# Altium PCB LM_HTR_001.PcbDoc (part 2 of 2)
Units mm, origin at the board's own origin, x right, y up, seen from the top; angles counter-clockwise.
Board outline 67 x 180 mm, 4 copper layers (Top Layer, +5V, Signal Layer 1, Bottom Layer), stack 0.778 mm thick; 148 components, 116 nets, 443 pads, 81 vias.
Unrouted connection lines stored in the file: 123.
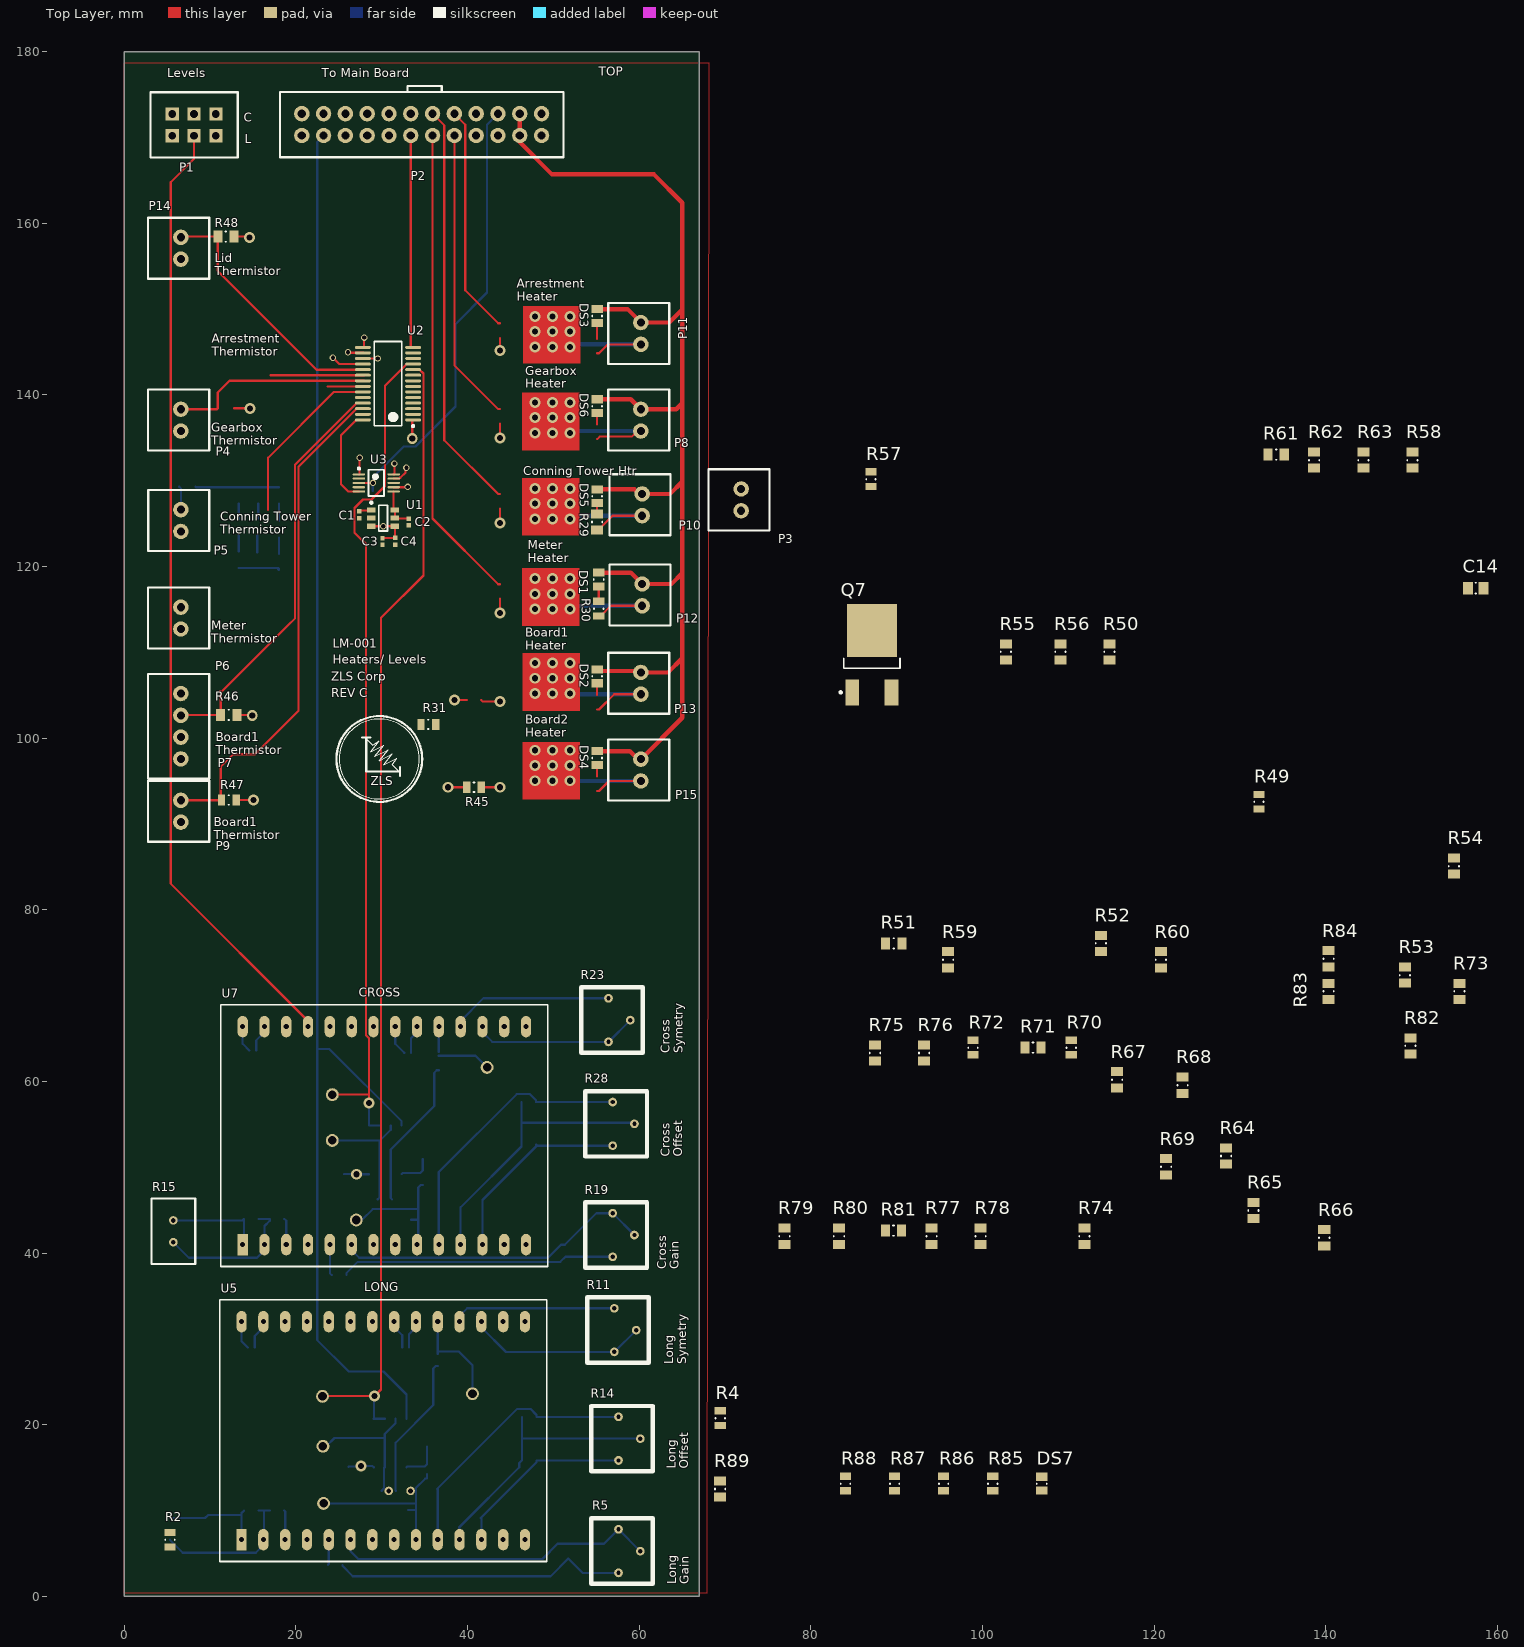
[diagram p0: Top Layer view]

## Via types
v1: diameter 1.27, hole 0.711, Top Layer to Bottom Layer, 71 vias
v2: diameter 0.75, hole 0.5, Top Layer to Bottom Layer, 10 vias

## Nets (pads, with @x,y where several pads share a name; then routed paths per layer and width w, separated by ;. In a path a pad name is that pad's centre, name@x,y a point inside that pad or via, vN(x,y) a via of type N, cw(c..) or ccw(c..) an arc to the next point about the centre after c; other vN are vias at no path point) (continued)
Cross_Yellow: (continued)
  Signal Layer 1 w0.254: P1.1 5.412,169.998 5.412,83.856 16.338,72.929 U7.27
  Bottom Layer w0.254: 15.386,63.583 15.386,64.782 16.338,65.734 U7.27
"CT Thermistor": C14.1 P5.2 R34.2 U8.2 | length 1.9
  Top Layer w0.254: 12.798,138.434 14.624,138.434 v1(14.643,138.415)
"Gearbox Heater FET": R47.1 | length 36.1
  Top Layer w0.254: R47.1@13.142,92.793 15.071,92.793 v1(15.075,92.796) ; 38.378,170.084 38.468,169.994 38.468,143.439 43.573,138.334 43.798,138.334
"Gearbox Htr Out": P6.2 Q3.4 R45.2 | length 15.2
  Top Layer w0.254: 55.098,134.834 55.396,135.132 59.131,135.132 59.78,135.781 60.198,135.781
  Bottom Layer w0.5: v1@50.456,135.781 60.198,135.781
  other v1: 47.866,135.561 49.898,135.561 51.93,135.561 47.866,137.339 49.898,137.339 51.93,137.339 47.866,139.117 49.898,139.117 51.93,139.117
"Gearbox Thermistor": P8.2 R53.2 | length 23.6
  Top Layer w0.254: 6.598,138.321 10.785,138.321 ; 10.898,138.434 10.898,140.267 12.263,141.632 27.909,141.632
"Lid Thermistor": P15.1 R89.2 | length 30.2
  Top Layer w0.254: 6.598,158.354 6.678,158.434 10.898,158.434 10.898,154.428 22.395,142.932 27.909,142.932
  Bottom Layer w0.254: 6.598,158.354 6.678,158.434
Long_Black: P1.4 U5.25 | length 147
  Signal Layer 1 w0.254: P1.4 7.088,171.674 7.088,166.609 7.139,166.558 7.139,160.411 7.8,159.751 7.8,140.32 7.988,140.131 7.988,95.122 17.35,85.761 17.35,36.603 21.293,32.659 U5.25
Long_Blue: P1.6 U5.24 | length 147.3
  Signal Layer 1 w0.254: P1.6 9.512,171.558 9.512,159.435 9.258,159.181 9.258,128.052 20.18,117.13 20.18,36.312 23.833,32.659 U5.24
Long_Raw: R8.1 TP1.1 U5.19 | length 11.8
  Bottom Layer w0.254: 36.533,28.234 U5.19 ; 36.538,28.546 38.939,28.546 40.577,26.909 TP1.1
Long_Yellow: C6.2 P1.2 U5.27 | length 149.4
  Signal Layer 1 w0.254: P1.2 4.548,171.674 4.548,81.57 10.29,75.828 10.29,38.582 16.213,32.659 U5.27
  Bottom Layer w0.254: 15.198,28.984 15.198,30.344 16.213,31.359 U5.27
"Meter Heater FET": R38.1 | length 55.6
  Top Layer w0.254: 35.838,170.084 35.928,169.994 35.928,125.579 43.573,117.934 43.798,117.934
"Meter Thermistor 1": P7.2 P7.3 | length 0.8
  Top Layer w0.254: 27.059,139.682 27.909,139.682
"Meter Thermistor 2": C1.2 C2.1 C3.2 C4.2 C5.2 C7.2 C9.2 C12.2 C13.2 P2.1 P2.2 P2.23 P2.24 P7.4 P15.2 Q1.3 Q2.3 Q3.3 Q4.3 Q5.3 Q6.3 Q7.3 R13.1 R27.1 R34.1 R42.1 R43.1 R44.1 R53.1 R64.1 R65.1 R66.1 R67.1 R68.1 R69.1 R73.1 R82.1 R83.1 R84.1 U1.2 U2.12 U2.27 U3.2 U3.4 U3.8 U5.22 U7.22 U8.11 | length 4.9
  Bottom Layer w0.254: R43.1 17.907,119.827 R44.1 ; R44.1@17.907,119.7 R44.1@18.034,119.573
"Meter Thermistor 2": U2.23 | length 20.4
  Top Layer w0.254: 16.764,126.575 16.764,132.671 24.425,140.332 U2.23@27.909,140.332
Meter_Htr_LED: DS2.2 R31.1
METER_HTR_OUT: P12.2 Q2.4 R31.2 | length 15.5
  Top Layer w0.254: 55.298,114.234 55.523,114.234 56.703,115.414 P12.2
  Bottom Layer w0.5: Q2.4@50.396,115.414 P12.2
  other v1: 47.866,115.034 49.898,115.034 51.93,115.034 47.866,116.812 49.898,116.812 51.93,116.812 47.866,118.59 49.898,118.59 51.93,118.59
"MUX A2": P2.7 U2.15 | length 24.7
  Top Layer w0.254: U2.15@27.909,145.532 27.953,145.575 v2(27.953,146.67)
  Signal Layer 1 w0.254: v2(27.953,146.67) 28.048,146.765 28.048,169.914 P2.7@28.218,170.084
"MUX A3": P2.11 U2.14 | length 24.7
  Top Layer w0.254: P2.11@33.298,170.084 33.388,169.994 33.388,145.576 33.433,145.532 U2.14@33.559,145.532
MUX_A0: P2.8 U2.17 | length 30.7
  Top Layer w0.254: U2.17@27.909,144.231 v2(29.553,144.231)
  Signal Layer 1 w0.254: P2.8@28.218,172.624 28.44,172.624 29.553,171.511 v2(29.553,144.231)
MUX_A1: P2.6 U2.16 | length 30.6
  Top Layer w0.254: v2(26.073,144.968) 26.141,144.9 27.891,144.9 U2.16@27.909,144.882
  Signal Layer 1 w0.254: P2.6@25.678,172.624 25.9,172.624 27.038,171.486 27.038,145.933 v2(26.073,144.968)
NetC1_1: C1.1 U1.1 | length 1.5
  Top Layer w0.254: C1.1 27.443,126.511 28.718,126.511 U1.1
NetC6_1: C6.1 U5.28
NetC8_1: C8.1 U5.21
NetC8_2: C8.2 U5.20
NetC10_1: C10.1 U7.28
NetC11_1: C11.1 U7.21 | length 3.4
  Bottom Layer w0.254: C11.1@33.198,28.984 33.198,30.564 33.993,31.359 33.993,32.009
NetC11_2: C11.2 U7.20 | length 3.4
  Bottom Layer w0.254: 31.453,32.009 31.453,31.359 32.398,30.414 C11.2@32.398,28.984
NetC14_2: C14.2 R29.1 R33.1 U8.1
NetDS1_2: DS1.2 R30.1 | length 1.8
  Top Layer w0.254: R30.1 DS1.2
NetDS3_2: DS3.2 R45.1
NetDS4_2: DS4.2 R49.1
NetDS5_2: DS5.2 R70.1
NetQ1_1: Q1.1 R33.2 | length 1.7
  Top Layer w0.254: v1(43.798,125.084) 43.798,126.734
NetQ2_1: Q2.1 R38.2 | length 1.7
  Top Layer w0.254: v1(43.798,114.584) 43.798,116.234
NetQ3_1: Q3.1 R47.2 | length 1.4
  Top Layer w0.254: v1(43.798,145.184) 43.798,146.634
NetQ4_1: Q4.1 R57.2 | length 1.7
  Top Layer w0.254: v1(43.798,134.984) 43.798,136.634
NetQ5_1: Q5.1 R72.2 | length 2.3
  Top Layer w0.254: 41.604,104.43 41.75,104.284 v1(43.798,104.284)
NetQ6_1: Q6.1 R87.2 | length 2.2
  Top Layer w0.254: 41.604,94.27 v1(43.802,94.27)
NetQ7_1: Q7.1 R88.2
NetR1_1: R1.1 R3.1 R4.1 U5.2 | length 17.2
  Bottom Layer w0.254: 5.321,6.589 6.828,5.082 15.336,5.082 16.213,5.959 16.298,6.044 16.298,9.984 ; 15.648,9.984 16.298,9.984 ; R3.1 16.298,9.984
NetR1_2: R1.2 R3.2 U5.1 | length 29
  Bottom Layer w0.254: 5.321,9.129 9.421,9.129 9.753,9.461 13.65,9.461 13.673,9.484 13.673,9.709 ; U5.1 13.673,9.709 ; 13.948,9.984 13.673,9.709 ; 31.673,12.278 31.623,12.328 31.623,17.904 36.015,22.296 36.015,26.548 36.313,26.846 36.538,26.846
NetR2_1: R2.1 R8.2 U4.6
NetR2_2: R2.2 TP3.1 U4.3 U4.7 | length 16.7
  Bottom Layer w0.254: TP3.1 23.533,17.485 24.498,18.451 30.353,18.451 ; 29.973,12.278 30.271,12.576 30.271,14.955 U4.7 30.353,18.451 ; U4.3 31.623,20.188 30.353,18.918 30.353,18.451
NetR4_2: R4.2 U5.3 | length 3.4
  Bottom Layer w0.254: 18.648,9.984 18.753,9.879 U5.3
NetR5_1: R5.1 R5.2 R7.2 U5.6 | length 38
  Bottom Layer w0.254: U5.6 26.373,5.247 27.267,4.354 48.73,4.354 50.494,6.118 51.753,6.118 55.905,6.118 R5.1 R5.2
NetR5_3: R5.3 R6.1 R7.1 | length 34.3
  Bottom Layer w0.254: R6.1 25.45,3.529 26.632,2.347 49.682,2.347 51.753,4.418 53.443,2.728 R5.3
NetR6_2: R6.2 U5.5 | length 3
  Bottom Layer w0.254: R6.2 23.833,3.751 U5.5
NetR9_1: R9.1 R13.2 U4.5 | length 4.6
  Bottom Layer w0.254: U4.5 32.972,15.116 34.995,15.116 R9.1 35.293,17.423
NetR10_1: R10.1 R12.1 R14.2 U5.11 | length 31.2
  Bottom Layer w0.254: U5.11 39.073,7.961 39.01,8.025 46.033,15.048 46.033,15.536 R12.1 46.331,18.374 ; R10.1 46.331,18.374 ; R14.2 46.331,18.374
NetR10_2: R10.2 R14.1 U5.10 | length 31.4
  Bottom Layer w0.254: 36.47,12.52 45.791,21.841 47.329,21.841 48.031,21.139 R10.2 R14.1 ; U5.10 36.533,12.507
NetR11_1: R11.1 U5.18 | length 19.1
  Bottom Layer w0.254: U5.18 39.073,32.659 39.974,33.56 R11.1
NetR11_2: R11.2 R11.3 U5.17 | length 20.9
  Bottom Layer w0.254: U5.17 41.613,31.359 44.493,28.48 R11.3 R11.2
NetR12_2: R12.2 R14.3 U5.12 | length 21.4
  Bottom Layer w0.254: 41.55,9.128 48.031,15.609 R12.2 R14.3 ; U5.12 41.613,9.103
NetR15_1: R15.1 R16.1 R17.1 U7.2 | length 16.9
  Bottom Layer w0.254: R15.1 7.53,39.457 15.461,39.457 16.338,40.334 16.338,43.149 16.948,43.759 R17.1 R16.1
NetR15_2: R15.2 R16.2 U7.1 | length 11.4
  Bottom Layer w0.254: R15.2 13.764,43.8 R16.2 13.948,41.134 U7.1
NetR17_2: R17.2 U7.3 | length 3.1
  Bottom Layer w0.254: R17.2 18.878,43.754 U7.3
NetR18_1: R18.1 R25.2 U6.6
NetR18_2: R18.2 TP7.1 U6.3 U6.7 | length 14.8
  Bottom Layer w0.254: TP7.1 29.744,53.122 29.782,53.084 ; 29.516,46.238 29.782,46.504 U6.7 29.782,53.084 ; U6.3 31.052,54.354 29.782,53.084
NetR19_1: R19.1 R19.2 R21.2 U7.6 | length 37.2
  Bottom Layer w0.254: U7.6 26.498,40.334 27.375,39.457 49.383,39.457 50.893,40.967 51.343,40.967 55.014,44.638 R19.1 R19.2
NetR19_3: R19.3 R20.1 R21.1 | length 32
  Bottom Layer w0.254: R20.1 25.882,37.649 27.201,38.969 50.82,38.969 51.409,39.558 R19.3
NetR20_2: R20.2 U7.5 | length 3.7
  Bottom Layer w0.254: U7.5 23.958,37.648 R20.2
NetR22_1: R22.1 R24.1 R28.2 U7.11 | length 32.7
  Bottom Layer w0.254: U7.11 39.198,45.333 46.28,52.414 46.28,55.179 ; R22.1 46.28,55.179 ; R28.2@59.449,55.179 46.28,55.179
NetR22_2: R22.2 R28.1 U7.10 | length 33
  Bottom Layer w0.254: U7.10 36.658,49.437 45.74,58.519 47.278,58.519 47.98,57.817 R22.2 56.836,57.592 R28.1@56.909,57.664
NetR23_1: R23.1 U7.18 | length 19
  Bottom Layer w0.254: U7.18 39.198,67.034 41.847,69.682 56.473,69.682 R23.1@56.477,69.679
NetR23_2: R23.2 R23.3 U7.17 | length 19.4
  Bottom Layer w0.254: U7.17 41.738,65.734 42.87,64.602 56.418,64.602 56.422,64.599 R23.2
NetR24_2: R24.2 R28.3 U7.12
NetR26_1: R26.1 R27.2 U6.5 | length 4
  Bottom Layer w0.254: U6.5 32.447,49.33 34.487,49.33 R26.1 34.785,50.951
NetR32_1: R32.1 R35.2 R36.2 R37.2 U8.3 | length 9.7
  Bottom Layer w0.254: R32.1 8.382,129.22 11.43,129.22 14.732,129.22 R37.2
NetR35_1: R35.1 R39.2 | length 1.7
  Bottom Layer w0.254: R39.2@15.621,125.603 R35.1
NetR36_1: R36.1 R40.2 | length 1.8
  Bottom Layer w0.254: R40.2 R36.1
NetR37_1: R37.1 R41.2 | length 2
  Bottom Layer w0.254: R41.2@18.034,125.283 R37.1
NetR39_1: R39.1 R42.2 | length 2
  Bottom Layer w0.254: R42.2@15.494,121.666 R39.1@15.494,123.637
NetR40_1: R40.1 R43.2 | length 1.9
  Bottom Layer w0.254: R43.2 R40.1
NetR41_1: R41.1 R44.2 | length 1.9
  Bottom Layer w0.254: R44.2@18.034,121.473 R41.1@18.034,123.383
NetR48_1: R48.1 R54.2 | length 1.9
  Top Layer w0.254: R48.1 14.537,158.434 v1(14.618,158.354)
NetR50_1: R50.1 R58.2
NetR51_1: R51.1 R59.2
NetR52_1: R52.1 R60.2
NetR54_1: R54.1 R61.2
NetR55_1: R55.1 R62.2
NetR56_1: R56.1 R63.2
NetR71_1: R71.1 R74.2
NetR74_1: R74.1 R79.2
NetR75_1: R75.1 R80.2
NetR76_1: R76.1 R81.2
NetTP2_1: TP2.1 U2.10 U4.1 U4.2 | length 133
  Top Layer w0.254: TP2.1 23.127,23.327 v1(29.147,23.327) 29.915,24.096 29.915,114.012 34.861,118.958 34.861,142.48 34.409,142.932 U2.10@33.559,142.932
  Bottom Layer w0.254: v1(29.147,23.327) 29.115,23.296 29.115,20.719 U4.1 U4.2
NetTP6_1: TP6.1 U2.11 U6.1 U6.2 | length 98.8
  Top Layer w0.254: TP6.1 28.537,58.456 ; v1(28.537,57.465) 28.537,58.456 ; U2.11@33.559,143.582 32.909,143.582 30.391,141.064 30.391,129.373 28.816,127.798 27.818,127.798 26.831,126.811 26.831,123.941 28.161,122.611 28.161,65.371 28.537,64.995 28.537,58.456
  Bottom Layer w0.254: v1(28.537,57.465) 28.524,57.452 28.524,54.867 U6.1 U6.2
SPI0_MISO: P2.9 U3.1 | length 40.9
  Top Layer w0.254: U3.1 27.43,130.736 27.432,130.738 v2(27.432,132.671)
  Signal Layer 1 w0.254: v2(27.432,132.671) 30.848,136.086 30.848,169.994 P2.9@30.758,170.084
SPI0_SCLK: P2.10 U3.10 | length 42.9
  Top Layer w0.254: U3.10 31.481,130.736 31.483,130.738 v2(31.483,131.989)
  Signal Layer 1 w0.254: P2.10@30.758,172.624 30.98,172.624 32.118,171.486 32.118,132.624 v2(31.483,131.989)
Thermistor_CS0: P2.12 U3.9 | length 44.8
  Top Layer w0.254: U3.9 31.989,130.236 32.087,130.334 32.16,130.334 32.785,130.96 32.785,131.411 v2(32.88,131.506)
  Signal Layer 1 w0.254: v2(32.88,131.506) 34.658,133.284 34.658,171.486 33.52,172.624 P2.12@33.298,172.624
VR_REF_Cross: C13.1 R26.2 TP8.1 U7.9 | length 15.8
  Bottom Layer w0.254: TP8.1 27.673,43.851 28.943,45.121 34.262,45.121 ; C13.1@33.407,43.901 33.433,43.876 C13.1@34.262,43.876 ; U7.9@34.077,41.128 34.262,41.313 C13.1@34.262,43.876 ; R26.2 34.56,47.928 34.262,47.63 34.262,45.121 ; C13.1@34.262,43.876 34.262,45.121
VR_REF_Long: C9.1 R9.2 TP4.1 U5.9 | length 20
  Bottom Layer w0.254: TP4.1 33.993,10.831 ; C9.1@33.103,10.069 33.968,10.069 C9.1@33.993,10.094 ; U5.9@33.961,6.577 U5.9 C9.1@33.993,10.094 ; 35.293,14.248 R9.2 35.068,13.714 33.993,12.639 33.993,10.831 ; C9.1@33.993,10.094 33.993,10.831
pads on no net: P2.4 P2.5 P2.13 P2.15 P2.16 P2.17 P2.18 R46.1 R50.2 R51.2 R52.2 R55.2 R56.2 R57.1 R58.1 R59.1 R60.1 R61.1 R62.1 R63.1 R64.2 R65.2 R66.2 R67.2 R68.2 R69.2 R75.2 R76.2 R77.2 R78.1 R79.1 R80.1 R81.1 R82.2 R83.2 R84.2 U2.2 U2.3 U2.4 U2.5 U2.6 U2.7 U2.8 U2.9 U2.13 U2.19 U2.20 U2.21 U2.24 U5.4 U5.8 U5.13 U5.14 U5.15 U5.16 U5.23 U5.26 U7.4 U7.8 U7.13 U7.14 U7.15 U7.16 U7.23 U7.26 U8.5 U8.6 U8.7 U8.8 U8.9 U8.10 U8.12 U8.13 U8.14
copper on no net: | length 108.2
  Top Layer w0.254: 13.142,102.699 14.876,102.699 v1(14.923,102.652) ; 35.838,172.624 36.06,172.624 37.291,171.393 37.291,134.716 43.573,128.434 43.798,128.434 ; 55.098,126.034 55.098,127.384 ; 55.098,136.534 55.098,137.884 ; 55.098,146.534 55.098,148.384
  Bottom Layer w0.254: 13.673,32.009 13.673,29.709 14.398,28.984 ; 13.798,66.384 13.798,64.371 14.586,63.583 ; 31.216,46.238 31.052,46.402 31.052,52.071 36.117,57.136 36.117,60.991 36.415,61.289 36.64,61.289 ; 31.578,66.384 31.578,64.371 32.62,63.329 ; 33.42,63.329 33.42,65.036 34.118,65.734 34.118,66.384 ; 41.738,40.984 41.738,46.173 47.98,52.414 47.98,52.639 48.107,52.512 56.836,52.512 56.909,52.584

## Polygon pours and split planes (outlines as drawn)
"Meter Thermistor 2" on Top Layer "Top_GND" (solid, shelved, pour order 1): -0.01,178.684 68.098,178.684 67.898,0.356 -0.01,0.356
"Meter Thermistor 2" on Bottom Layer "Bottom_GND" (solid, shelved, pour order 0): -0.01,-0.016 68.098,-0.016 68.098,178.684 -0.01,178.684
"Meter Thermistor 2" on Signal Layer 1 "Top_GND" (solid, shelved, pour order 3): -0.165,179.298 67.943,179.298 67.943,0.598 -0.165,0.598
+5 on +5V (split plane): 66.49,179.49 66.49,0.51 0.51,0.51 0.51,179.49

## Other copper
Top Layer:
  rectangle net "Arrestment Htr Out": 46.444,143.647 53.15,150.353
  rectangle net "Gearbox Htr Out": 46.342,133.538 53.048,140.244
  rectangle net "Conning Tower Htr Out": 46.368,123.581 53.073,130.287
  rectangle net METER_HTR_OUT: 46.368,113.091 53.073,119.797
  rectangle net "Board2 Htr Out": 46.393,92.822 53.099,99.527
  rectangle net "Board1 Htr Out": 46.393,103.185 53.099,109.891

## Silkscreen, mask and mechanical layers (free items; w line width, h text height)
Top Overlay:
  circle w0.254: c29.722,97.567 r5
  circle w0.1: c29.722,97.567 r4.663
  lines w0.127: 28.198,99.929 28.96,99.167 29.722,99.675 28.706,98.405 30.23,99.167 29.214,97.897 30.738,98.659 29.722,97.389 31.246,98.151 30.23,96.881 31.754,97.643 31.246,96.881 32.008,96.119
  lines w0.254: 27.69,100.056 28.706,100.056 ; 28.198,99.929 28.198,96.119 32.008,96.119 ; 32.135,95.611 32.135,96.627 ; 33,175.311 33,176 37,176 37,175.336
  text "TOP" at 55.317,177.152 h1
  text "Levels" at 5,177 h1
  text "To Main Board" at 23,177 h1
  text "C" at 13.907,171.841 h1
  text "L" at 14.059,169.301 h1
  text "Lid / Thermistor" at 10.528,153.96 h1
  text "Arrestment / Heater" at 45.72,150.959 h1
  text "Arrestment / Thermistor" at 10.198,144.562 h1
  text "Gearbox / Heater" at 46.736,140.799 h1
  text "Gearbox / Thermistor" at 10.16,134.195 h1
  text "Conning Tower Htr" at 46.482,130.639 h1
  text "Conning Tower / Thermistor" at 11.176,123.825 h1
  text "Meter / Heater" at 46.99,120.479 h1
  text "Meter / Thermistor" at 10.16,111.125 h1
  text "LM-001" at 24.308,110.541 h1
  text "Board1 / Heater" at 46.736,110.319 h1
  text "Heaters/ Levels" at 24.308,108.636 h1
  text "ZLS Corp" at 24.13,106.68 h1
  text "REV C" at 24.13,104.775 h1
  text "Board2 / Heater" at 46.736,100.159 h1
  text "Board1 / Thermistor" at 10.668,98.127 h1
  text "ZLS" at 28.706,94.519 h1
  text "Board1 / Thermistor" at 10.414,88.221 h1
  text "CROSS" at 27.305,69.85 h1
  text "Cross / Symetry" at 65.088,63.256 h1 r90
  text "Cross / Offset" at 65.037,51.191 h1 r90
  text "Cross / Gain" at 64.63,38.11 h1 r90
  text "LONG" at 27.94,35.56 h1
  text "Long / Symetry" at 65.494,27.036 h1 r90
  text "Long / Offset" at 65.748,14.895 h1 r90
  text "Long / Gain" at 65.799,1.433 h1 r90
Bottom Overlay:
  lines w0.254: 10.795,118.237 10.795,121.285 10.795,127.889 10.795,130.683 10.922,130.81 19.685,130.81 19.685,118.237 10.795,118.237

## Dimensions
0,180 to 67,180 on Mechanical 13
0,0 to 67,0 on Mechanical 13
67,0 to 67,180 on Mechanical 13